# Altium PCB PW-Sat2_EPS_EM_Rbl.PcbDoc
Units mm, origin at the board's own origin, x right, y up, seen from the top; angles counter-clockwise.
Board outline 36.83 x 41.66 mm, 2 copper layers (Top Layer, Bottom Layer), stack 1.571 mm thick; 33 components, 17 nets, 110 pads, 4 vias.
Unrouted connection lines stored in the file: 2.
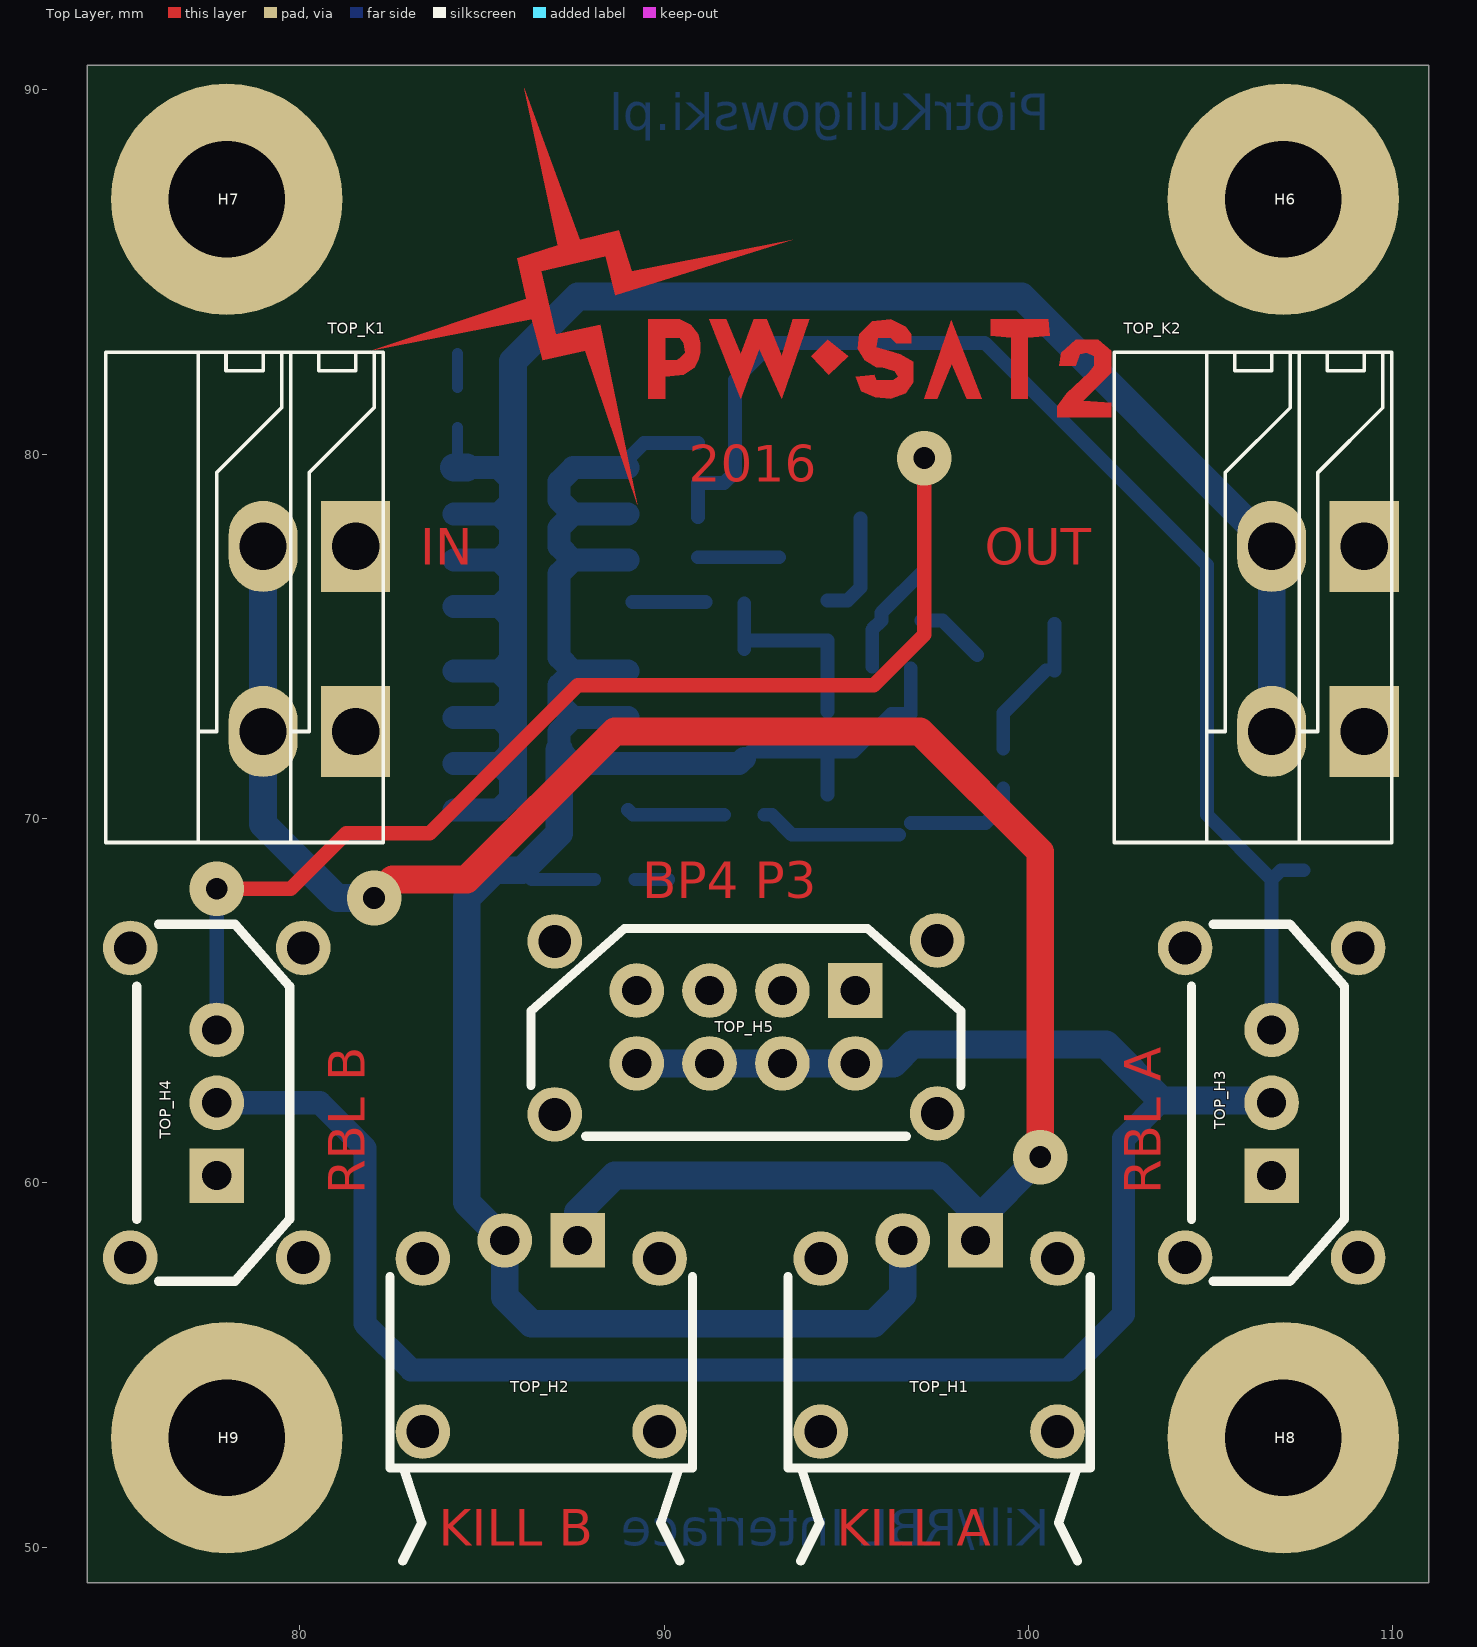
[diagram p0: Top Layer view]
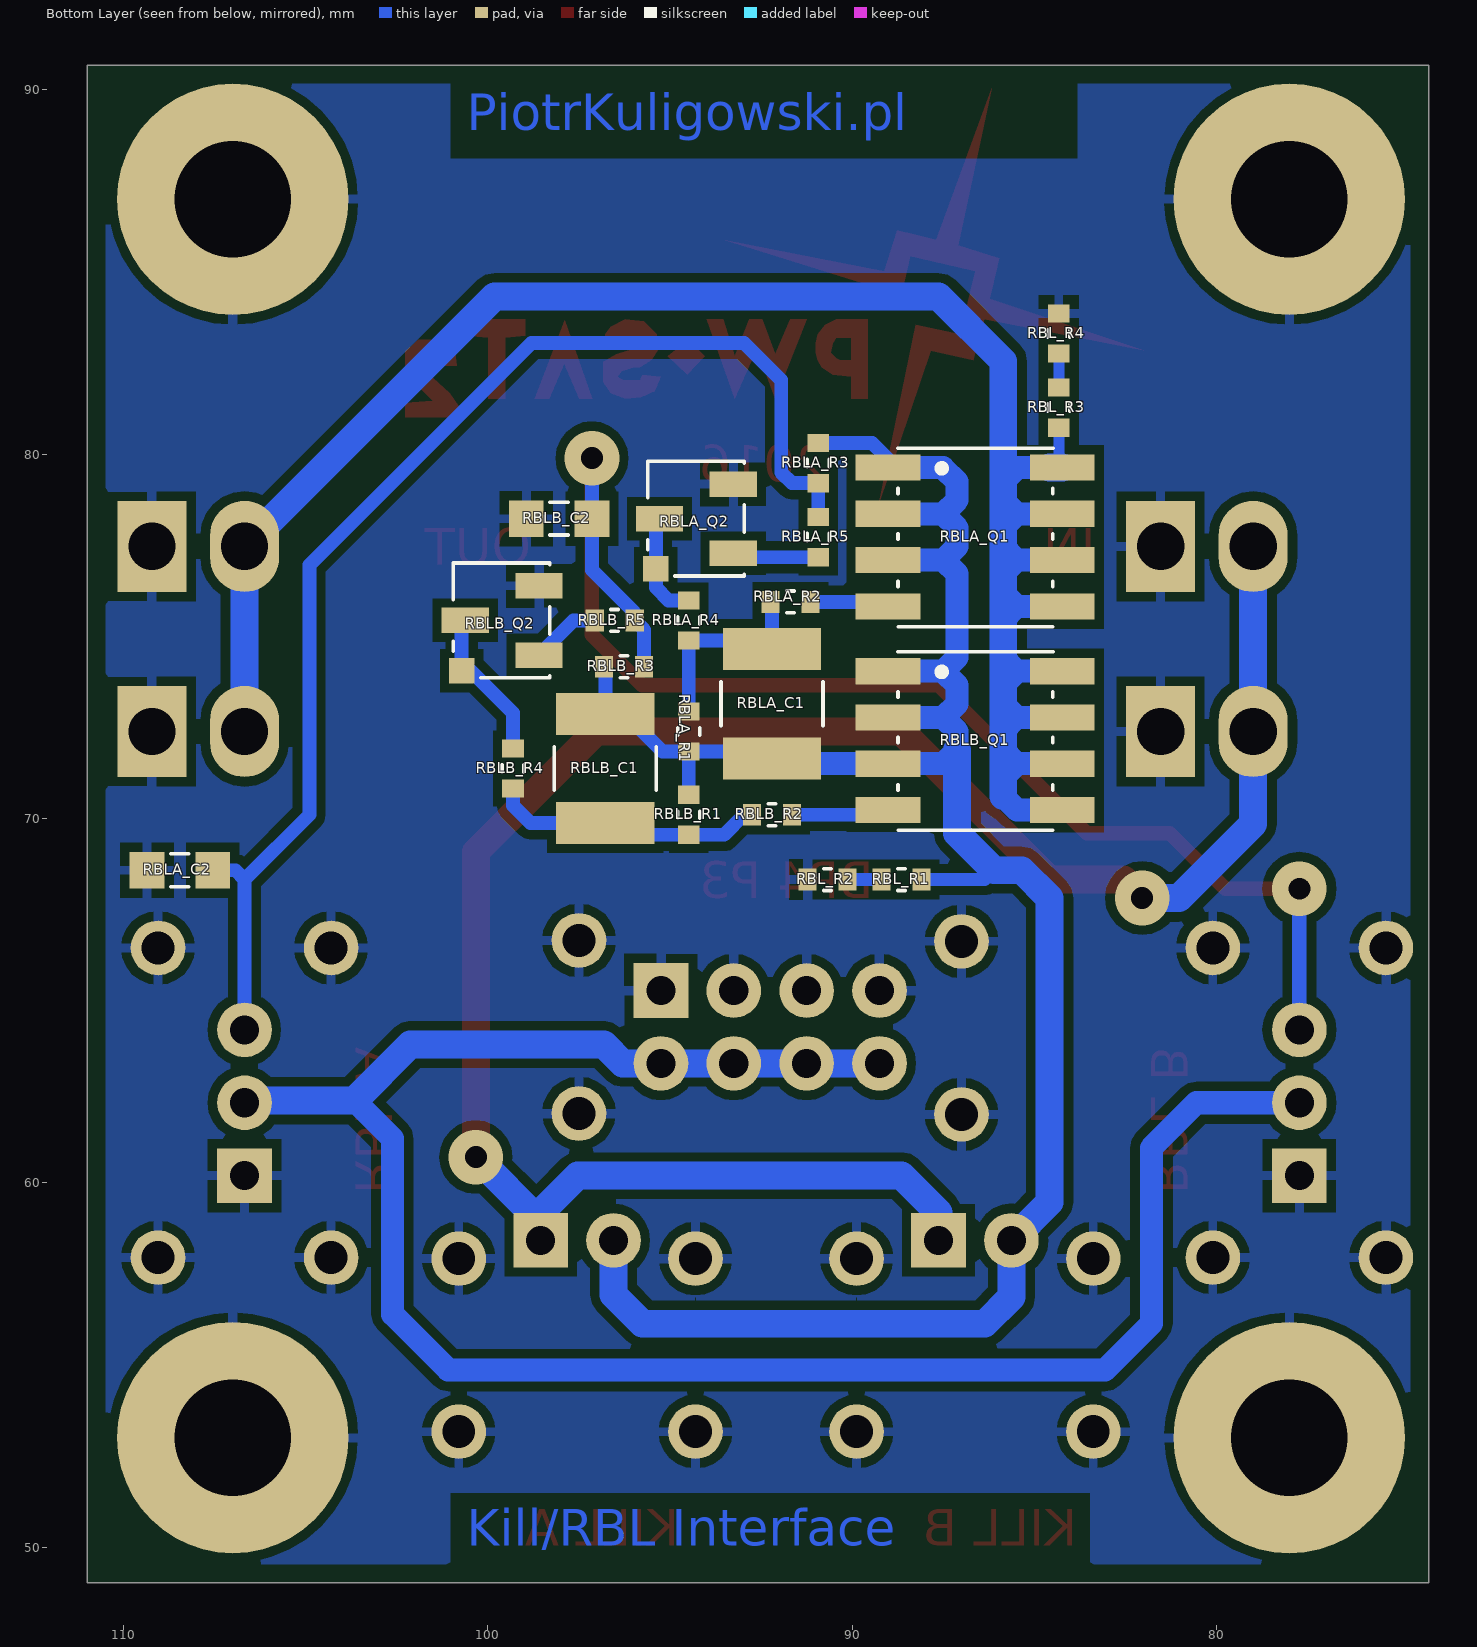
[diagram p1: Bottom Layer view, seen from below]
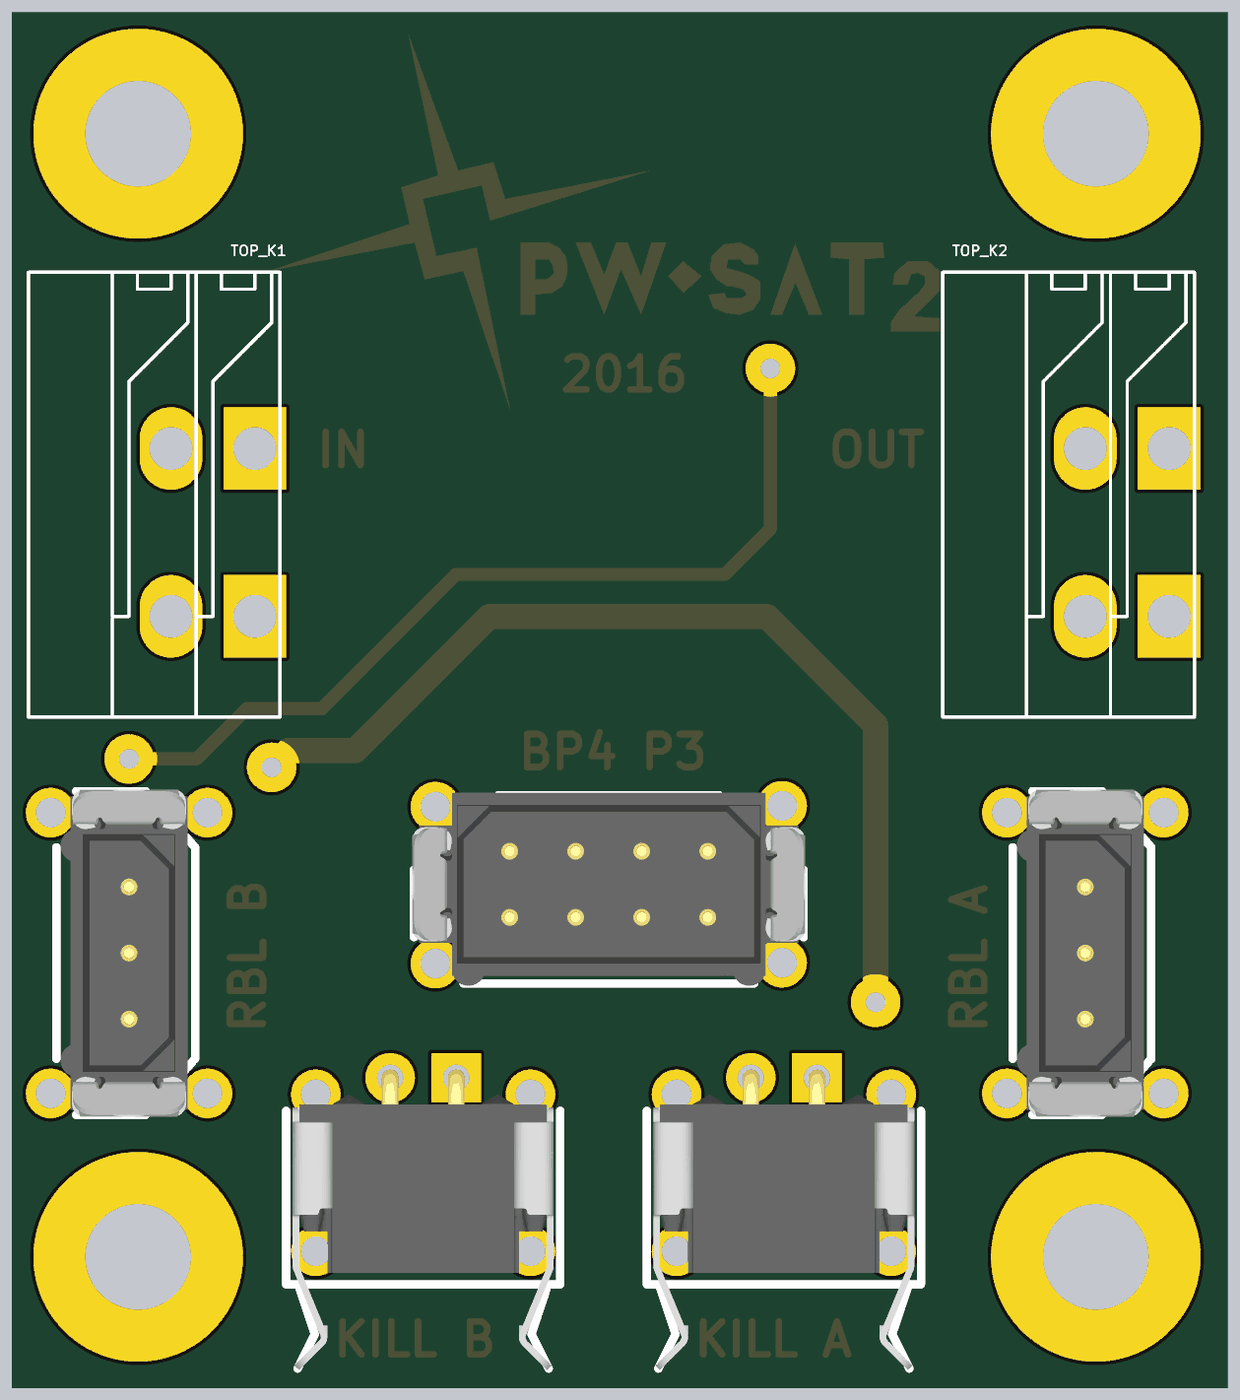
[diagram p2: 3D render of the assembled board from above, using the file's embedded part models]
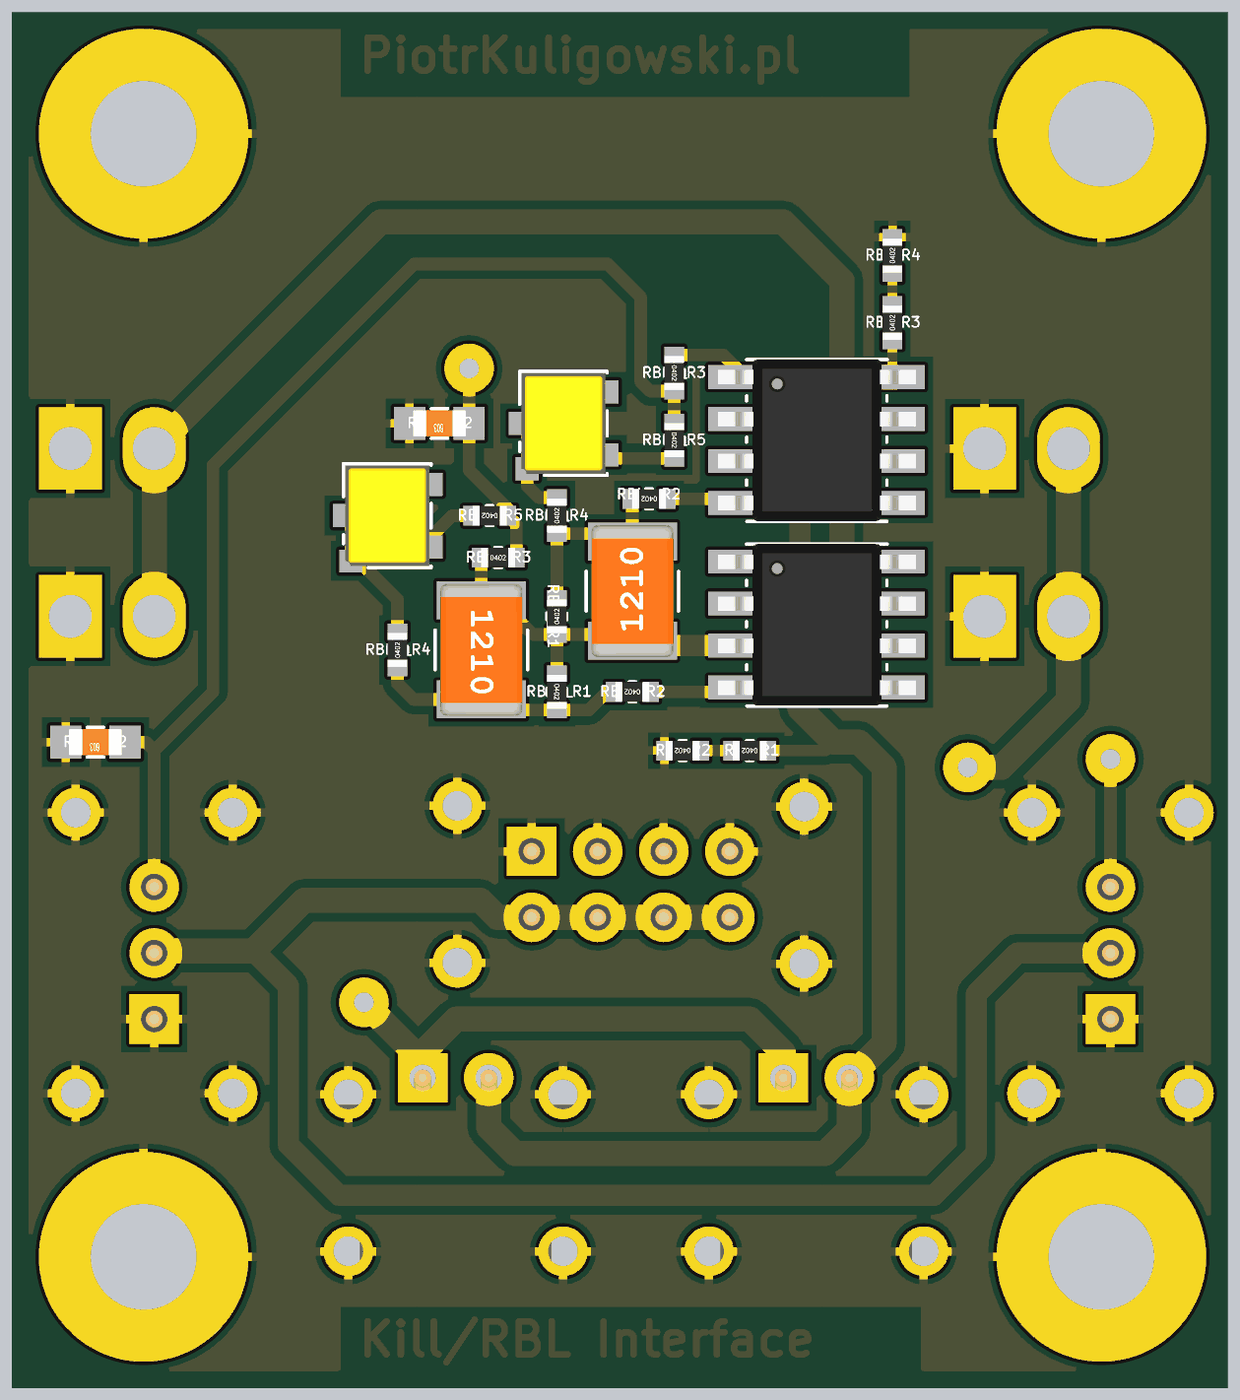
[diagram p3: 3D render of the assembled board from below, using the file's embedded part models]

## Layer stack, top to bottom
Top Layer: signal copper 0.0356
Dielectric 1: core 1.5, FR-4, Dk 4.2
Bottom Layer: signal copper 0.0356

## Board outline
74.168,49.022 74.168,90.678 110.998,90.678 110.998,49.022

## Design rules (kind name [scope] priority, off if disabled: settings)
Clearance [All] p1: gap=0.254
ComponentClearance [All] p1: gap=0.254 collisioncheckmode=3 verticalgap=0 showdistances=FALSE
PolygonConnect [All] p1: connectstyle=Relief reliefconductorwidth=0.254 reliefentries=4 polygonreliefangle="90 Angle" airgapwidth=0.254
RoutingVias [All] p1: holewidth=0.711 width=1.27 viastyle="Through Hole" minholewidth=0.711 minwidth=1.27 maxholewidth=0.711 maxwidth=1.27
SolderMaskExpansion [All] p1: expansion=0.102
Width [All] p1: maxlimit=1.27 minlimit=0.254 preferedwidth=0.254
29 further rules are at their usual default settings.

## Classes and differential pairs
component class "RBL & Inrush Limit": RBL_R1 RBL_R2 RBL_R3 RBL_R4 RBLA_C1 RBLA_C2 RBLA_Q1 RBLA_Q2 RBLA_R1 RBLA_R2 RBLA_R3 RBLA_R4 RBLA_R5 RBLB_C1 RBLB_C2 RBLB_Q1 RBLB_Q2 RBLB_R1 RBLB_R2 RBLB_R3 RBLB_R4 RBLB_R5
component class top_power: H6 H7 H8 H9 TOP_H1 TOP_H2 TOP_H3 TOP_H4 TOP_H5 TOP_K1 TOP_K2

## Components (designator, comment, footprint, x,y, rotation, side; value= is the part's Value field where it differs from the comment)
H6 "Mounting Hole" PC-104_PcbMntHole_M3 107,87 r0 top
H7 "Mounting Hole" PC-104_PcbMntHole_M3 78,87 r0 top
H8 "Mounting Hole" PC-104_PcbMntHole_M3 107,53 r0 top
H9 "Mounting Hole" PC-104_PcbMntHole_M3 78,53 r0 top
RBL_R1 "470k/1%" SMD_Resistor_0402 88.646,68.326 r0 bottom
RBL_R2 "470k/1%" SMD_Resistor_0402 90.678,68.326 r0 bottom
RBL_R3 "470k/1%" SMD_Resistor_0402 84.328,81.28 r90 bottom
RBL_R4 "470k/1%" SMD_Resistor_0402 84.328,83.312 r90 bottom
RBLA_C1 "10u/35V" SMD_Capacitor_1210 92.202,73.152 r90 bottom
RBLA_C2 "100n/50V" SMD_Capacitor_0603 108.458,68.58 r0 bottom
RBLA_Q1 "IRF7416" SOIC-8-N_SSSGDDDD 86.614,77.724 r180 bottom
RBLA_Q2 "2N2222ACSM" LCC1-4_BEC 92.964,78.232 r90 bottom
RBLA_R1 "10k/1%" SMD_Resistor_0402 94.488,72.39 r90 bottom
RBLA_R2 "220R/1%" SMD_Resistor_0402 91.694,75.946 r0 bottom
RBLA_R3 "22k/1%" SMD_Resistor_0402 90.932,79.756 r270 bottom
RBLA_R4 "4.7k/1%" SMD_Resistor_0402 94.488,75.438 r90 bottom
RBLA_R5 "10k/1%" SMD_Resistor_0402 90.932,77.724 r270 bottom
RBLB_C1 "10u/35V" SMD_Capacitor_1210 96.774,71.374 r270 bottom
RBLB_C2 "100n/50V" SMD_Capacitor_0603 98.044,78.232 r0 bottom
RBLB_Q1 "IRF7416" SOIC-8-N_SSSGDDDD 86.614,72.136 r180 bottom
RBLB_Q2 "2N2222ACSM" LCC1-4_BEC 98.298,75.438 r90 bottom
RBLB_R1 "22k/1%" SMD_Resistor_0402 94.488,70.104 r270 bottom
RBLB_R2 "220R/1%" SMD_Resistor_0402 92.202,70.104 r0 bottom
RBLB_R3 "22k/1%" SMD_Resistor_0402 96.266,74.168 r180 bottom
RBLB_R4 "10k/1%" SMD_Resistor_0402 99.314,71.374 r90 bottom
RBLB_R5 "10k/1%" SMD_Resistor_0402 96.52,75.438 r0 bottom
TOP_H1 "KillSwitch-A" Harwin_Datamate_L-Tek_M80-8760205 98.552,58.42 r180 top
TOP_H2 "KillSwitch-B" Harwin_Datamate_L-Tek_M80-8760205 87.63,58.42 r180 top
TOP_H3 "RblSwitch-A" Harwin_Datamate_L-Tek_M80-8770305 106.68,60.198 r90 top
TOP_H4 "RblSwitch-B" Harwin_Datamate_L-Tek_M80-8770305 77.724,60.198 r90 top
TOP_H5 "BP4_P3" Harwin_Datamate_L-Tek_M80-8670805 95.25,65.278 r180 top
TOP_K1 "TB-2.5-PD-xx" TerminalBlock_Spring_2.54_2-R 81.534,72.39 r90 top
TOP_K2 "TB-2.5-PD-xx" TerminalBlock_Spring_2.54_2-R 109.22,72.39 r90 top

## Footprints (in the part's own frame and the unit in brackets; to place one, negate y for a bottom-side part, rotate by r counter-clockwise, add the part's x,y. Pads: shape width x height; smd on the part's side, far side on the other; paste and mask are expansions set on the pad)
Harwin_Datamate_L-Tek_M80-8670805 [mm] "Harwin Datamate L-Teck M80-8670805, 2mm pitch, 2x4pin."
  round 1.5 hole 0.9: 0(-2.25,3.375) 0(-2.25,-1.375) 0(8.25,-1.35) 0(8.25,3.4)
  rect 1.5x1.5 hole 0.8: 1(0,0)
  round 1.5 hole 0.8: 2(0,2) 3(2,0) 4(2,2) 5(4,0) 6(4,2) 7(6,0) 8(6,2)
  silkscreen extent -2.9,-1.7 8.9,4, body extent -2.95,-1.77 8.95,4.08, height 8.35
Harwin_Datamate_L-Tek_M80-8760205 [mm] "Harwin Datamate L-Teck M80-8760205, 2mm pitch, 1x2pin, right angle."
  round 1.5 hole 0.9: 0(-2.25,5.25) 0(-2.25,0.5) 0(4.25,5.25) 0(4.25,0.5)
  rect 1.5x1.5 hole 0.8: 1(0,0)
  round 1.5 hole 0.8: 2(2,0)
  silkscreen extent -3.15,1 5.15,8.8, body extent -2.95,-0.25 4.95,8.85, height 3.88
Harwin_Datamate_L-Tek_M80-8770305 [mm] "Harwin Datamate L-Teck M80-8770305, 2mm pitch, 1x3pin."
  round 1.5 hole 0.9: 0(-2.25,-2.375) 0(-2.25,2.375) 0(6.25,-2.375) 0(6.25,2.375)
  rect 1.5x1.5 hole 0.8: 1(0,0)
  round 1.5 hole 0.8: 2(2,0) 3(4,0)
  silkscreen extent -2.9,-2 6.9,2.2, body extent -2.95,-1.77 6.95,2.08, height 8.21
LCC1-4_BEC [mm] "Hermetic Leadless Chip Carrier Number 1, 4 Pads, Base-Emitter-Collector"
  rect 0.7x1.3 smd: B(-0.95,0.3) C(0,2.325) E(0.95,0.3)
  rect 0.7x0.7 smd: Shield(-1.375,2.425)
  silkscreen extent -1.58,0 1.58,2.65, body extent -1.53,0.05 1.52,2.6, height 1.4
PC-104_PcbMntHole_M3 [mm] "PCB Mounting Hole for PC-104 standard. Based on Pumpkin's Kit."
  round 6.35 hole 3.2: 1(0,0)
SMD_Capacitor_0603 [mm] "SMD Capacitor, Inch 0603, Metric 1608."
  rect 0.95x1 smd: 1(-0.9,0) 2(0.9,0)
  silkscreen extent -0.25,-0.45 0.25,0.45, body extent -0.8,-0.4 0.8,0.4, height 0.3
SMD_Capacitor_1210 [mm] "SMD Capacitor, Inch 1210, Metric 3225."
  rect 1.15x2.7 smd: 1(-1.5,0) 2(1.5,0)
  silkscreen extent -0.6,-1.4 0.6,1.4, body extent -2,-1.24 2,1.24, height 1.7
SMD_Resistor_0402 [mm] "SMD Resistor, Inch 0402, Metric 1005."
  rect 0.5x0.6 smd: 1(-0.55,0) 2(0.55,0)
  silkscreen extent -0.1,-0.3 0.1,0.3, body extent -0.52,-0.3 0.52,0.3, height 0.34
SOIC-8-N_SSSGDDDD [mm] "JEDEC standard. SO-8. SSSGDDDD."
  rect 1.78x0.72 smd: D(2.38,-1.9) D(2.38,-0.63) D(2.38,0.64) D(2.38,1.91) G(-2.4,-1.9) S(-2.4,-0.63) S(-2.4,0.64) S(-2.4,1.91)
  silkscreen extent -2.13,-2.46 2.13,2.44, body extent -3,-2.45 3,2.45, height 1.7
TerminalBlock_Spring_2.54_2-R [mm] "Terminal block with spring, 2.54mm pitch, right angle, 2-pin."
  rect 2.5x1.9 hole 1.3: 1(0,0) 1(5.08,0)
  oval 2.5x1.9 hole 1.3: 2(0,2.54) 2(5.08,2.54)
  silkscreen extent -3.05,-0.76 10.41,6.86, body extent -3.05,-0.74 10.41,6.86, height 12.6

## Part data
H6 H7 H8 H9: library part MntHole, "PCB Mounting Hole"
RBL_R1 RBL_R2 RBL_R3 RBL_R4: library part CRCW0402470KFKxxxx, "470k/1% Vishay CRCW 0402 Resistor. 63mW, 100ppm, 50V."
RBLA_C1 RBLB_C1: library part Cer_GCM32EC7YA106KA03K, "Ceramic Cap Murata Automotive 10u/35V X7S 1210"
RBLA_C2 RBLB_C2: library part Cer_GCJ188R71H104KA12D, "Ceramic Cap Murata Automotive 100n/50V X7R 0603"
RBLA_Q1 RBLB_Q1: "10A/30V HEXFET Power P-MOSFET."
RBLA_Q2 RBLB_Q2: "Silicon Planar Epitaxial NPN Transistor."
RBLA_R1 RBLA_R5 RBLB_R4 RBLB_R5: library part CRCW040210K0FKxxxx, "10k/1% Vishay CRCW 0402 Resistor. 63mW, 100ppm, 50V."
RBLA_R2 RBLB_R2: library part CRCW0402220RFKxxxx, "220R/1% Vishay CRCW 0402 Resistor. 63mW, 100ppm, 50V."
RBLA_R3 RBLB_R1 RBLB_R3: library part CRCW040222K0FKxxxx, "22k/1% Vishay CRCW 0402 Resistor. 63mW, 100ppm, 50V."
RBLA_R4: library part CRCW04024K70FKxxxx, "4.7k/1% Vishay CRCW 0402 Resistor. 63mW, 100ppm, 50V."
TOP_H1 TOP_H2: library part Harwin_Datamate_L-Tek_1x2pin, "Harwin DataMate L-Tek, 2mm pitch, 1x2pin."
TOP_H3 TOP_H4: library part Harwin_Datamate_L-Tek_1x3pin, "Harwin DataMate L-Tek, 2mm pitch, 1x3pin."
TOP_H5: library part Harwin_Datamate_L-Tek_2x4pin, "Harwin DataMate L-Tek, 2mm pitch, 2x4pin."
TOP_K1 TOP_K2: library part TerminalBlock_Spring_2.54_2-R, "Terminal block with spring, 2-pin, 2.54mm pitch, right angle."

## Via types
v1: diameter 1.5, hole 0.6, Top Layer to Bottom Layer, 4 vias

## Nets (pads, with @x,y where several pads share a name; then routed paths per layer and width w, separated by ;. In a path a pad name is that pad's centre, name@x,y a point inside that pad or via, vN(x,y) a via of type N, cw(c..) or ccw(c..) an arc to the next point about the centre after c; other vN are vias at no path point)
NetRBL_R1_1: RBL_R1.1 RBLA_C1.1 RBLA_Q1.S RBLA_R1.1 RBLA_R3.1 RBLB_C1.1 RBLB_Q1.S RBLB_R1.1 RBLB_R3.1 TOP_H1.2 TOP_H2.2 | length 63.7
  Bottom Layer w0.35: 86.106,68.58 86.36,68.326 RBL_R1.1
  Bottom Layer w0.381: RBLA_Q1.S@89.014,79.634 89.014,79.87 89.45,80.306 RBLA_R3.1 ; RBLA_C1.1@92.39,71.84 RBLA_R1.1 ; RBLB_R1.1 RBLA_R1.1 ; RBLB_R3.1@96.774,74.126 RBLB_C1.1 96.242,72.874 95.208,71.84 RBLA_R1.1
  Bottom Layer w0.635: RBLB_Q1.S@89.014,72.776 87.498,72.776 ; RBLB_Q1.S@89.014,74.046 87.498,74.046 ; RBLA_Q1.S@89.014,77.094 87.498,77.094 ; RBLA_Q1.S@89.014,78.364 87.508,78.364 ; RBLA_Q1.S@89.014,79.634 87.508,79.634 87.122,79.248 87.122,78.74 87.498,78.364 87.508,78.364 ; RBLA_C1.1 92.056,71.506 89.014,71.506 87.498,71.506 87.122,71.882 87.122,72.39 87.498,72.766 87.498,72.776 ; 87.498,72.776 87.122,73.152 87.122,73.66 87.498,74.036 87.498,74.046 ; 87.498,74.046 87.122,74.422 87.122,76.718 87.498,77.094 ; 87.498,77.094 87.122,77.47 87.122,77.978 87.508,78.364
  Bottom Layer w0.762: 87.122,71.882 87.122,69.596 86.106,68.58 85.344,68.58 84.582,67.818 84.582,59.468 TOP_H2.2 85.63,56.864 86.36,56.134 95.758,56.134 96.552,56.928 TOP_H1.2
NetRBL_R1_2: RBL_R1.2 RBL_R2.1 | length 0.9
  Bottom Layer w0.35: RBL_R1.2 RBL_R2.1
NetRBL_R3_1: RBL_R3.1 RBLA_Q1.D RBLB_Q1.D TOP_K2.2 | length 63.9
  Bottom Layer w0.3: RBLA_Q1.D@84.328,79.728 RBL_R3.1
  Bottom Layer w0.635: RBLB_Q1.D@84.234,70.236 85.476,70.236 85.852,70.612 85.852,71.12 85.466,71.506 ; RBLB_Q1.D@84.234,71.506 85.466,71.506 ; RBLB_Q1.D@84.234,72.776 85.476,72.776 ; RBLB_Q1.D@84.234,74.046 85.476,74.046 ; RBLA_Q1.D@84.234,75.824 85.476,75.824 ; RBLA_Q1.D@84.234,77.094 85.476,77.094 ; RBLA_Q1.D@84.234,78.364 85.476,78.364 ; RBLA_Q1.D@84.582,79.634 85.466,79.634 85.852,79.248 85.852,78.74 85.476,78.364 ; 85.466,71.506 85.476,71.506 85.852,71.882 85.852,72.4 85.476,72.776 ; 85.476,72.776 85.852,73.152 85.852,73.66 85.476,74.036 85.476,74.046 ; 85.476,74.046 85.852,74.422 85.852,75.448 85.476,75.824 ; 85.476,75.824 85.852,76.2 85.852,76.718 85.476,77.094 ; 85.476,77.094 85.852,77.47 85.852,77.978 85.476,78.354 85.476,78.364
  Bottom Layer w0.762: RBLA_Q1.D@84.234,79.634 RBLA_Q1.D@84.582,79.634 ; 85.852,70.612 85.852,82.55 87.63,84.328 99.822,84.328 106.68,77.47 TOP_K2.2@106.68,72.39
NetRBL_R3_2: RBL_R3.2 RBL_R4.1 | length 0.9
  Bottom Layer w0.3: RBL_R3.2 RBL_R4.1
NetRBLA_C1_2: RBLA_C1.2 RBLA_R1.2 RBLA_R2.2 RBLA_R4.1 | length 5.3
  Bottom Layer w0.381: RBLA_C1.2 RBLA_R2.2@92.202,75.904 ; RBLA_C1.2@92.438,74.888 RBLA_R4.1 RBLA_R1.2
NetRBLA_Q1_G: RBLA_Q1.G RBLA_R2.1 | length 2
  Bottom Layer w0.381: RBLA_Q1.G@89.136,75.946 RBLA_R2.1
NetRBLA_Q2_B: RBLA_Q2.B RBLA_R5.2 | length 2.2
  Bottom Layer w0.381: RBLA_R5.2 RBLA_Q2.B@93.156,77.174
NetRBLA_Q2_C: RBLA_Q2.C RBLA_Q2.Shield RBLA_R4.2 | length 2.9
  Bottom Layer w0.381: RBLA_R4.2 95.038,75.988 95.389,76.339 RBLA_Q2.C@95.389,78.232
NetRBLB_C1_2: RBLB_C1.2 RBLB_R1.2 RBLB_R2.2 RBLB_R4.1 | length 7.1
  Bottom Layer w0.381: RBLB_R2.2 92.964,70.104 93.514,69.554 RBLB_R1.2 RBLB_C1.2@96.454,69.554 ; RBLB_C1.2 98.83,69.874 99.314,70.358 RBLB_R4.1
NetRBLB_Q1_G: RBLB_Q1.G RBLB_R2.1 | length 2.7
  Bottom Layer w0.381: RBLB_Q1.G 89.146,70.104 RBLB_R2.1
NetRBLB_Q2_B: RBLB_Q2.B RBLB_R5.2 | length 1.9
  Bottom Layer w0.381: RBLB_R5.2 97.648,75.438 RBLB_Q2.B
NetRBLB_Q2_C: RBLB_Q2.C RBLB_Q2.Shield RBLB_R4.2 | length 3.9
  Bottom Layer w0.381: RBLB_R4.2 99.314,72.898 RBLB_Q2.Shield@100.479,74.063 ; RBLB_Q2.Shield RBLB_Q2.C@100.723,75.338
NetTOP_H1_1: TOP_H1.1 TOP_H2.1 TOP_K1.2 | length 57.2
  Top Layer w0.762: v1(82.042,67.818) 82.55,68.326 84.582,68.326 88.646,72.39 97.028,72.39 100.33,69.088 v1(100.33,60.706)
  Bottom Layer w0.762: TOP_K1.2@78.994,77.47 78.994,72.39 78.994,69.85 81.026,67.818 v1(82.042,67.818) ; TOP_H2.1 87.63,59.182 88.646,60.198 97.536,60.198 98.552,59.182 TOP_H1.1@98.552,58.928 ; TOP_H1.1 TOP_H1.1@98.552,58.928 ; v1(100.33,60.706) TOP_H1.1@98.552,58.928
NetTOP_H3_2: TOP_H3.2 TOP_H4.2 TOP_H5.2 TOP_H5.4 TOP_H5.6 TOP_H5.8 | length 55.4
  Bottom Layer w0.635: TOP_H4.2@78.232,62.198 80.55,62.198 81.788,60.96 81.788,56.134 83.058,54.864 101.092,54.864 102.616,56.388 102.616,61.214 103.664,62.262
  Bottom Layer w0.762: TOP_H5.8 TOP_H5.6 TOP_H5.4 TOP_H5.2 96.298,63.278 96.816,63.796 102.13,63.796 103.664,62.262 TOP_H3.2@106.616,62.262
PGND: H6.1 H7.1 H8.1 H9.1 RBL_R2.2 RBL_R4.2 RBLA_C2.2 RBLA_Q2.E RBLB_C2.2 RBLB_Q2.E TOP_H1.0 TOP_H2.0 TOP_H3.0 TOP_H3.1 TOP_H4.0 TOP_H4.1 TOP_H5.0 TOP_H5.1 TOP_H5.3 TOP_H5.5 TOP_H5.7 TOP_K1.1 TOP_K2.1
RBLA: RBLA_C2.1 RBLA_R3.2 RBLA_R5.1 TOP_H3.3 | length 35
  Bottom Layer w0.381: RBLA_R5.1 RBLA_R3.2 91.652,79.206 91.948,79.502 91.948,82.042 92.964,83.058 98.806,83.058 104.902,76.962 104.902,70.104 106.68,68.326 ; TOP_H3.3 106.68,68.326 ; RBLA_C2.1 106.934,68.58 106.68,68.326
RBLB: RBLB_C2.1 RBLB_R3.2 RBLB_R5.1 TOP_H4.3 | length 37.3
  Top Layer w0.4: v1(77.724,68.072) 79.756,68.072 81.28,69.596 83.566,69.596 87.63,73.66 95.758,73.66 97.144,75.046 v1(97.144,79.894)
  Bottom Layer w0.381: RBLB_R3.2 95.716,75.184 RBLB_R5.1 95.97,75.65 97.144,76.824 RBLB_C2.1 v1(97.144,79.894)
  Bottom Layer w0.4: TOP_H4.3 v1(77.724,68.072)

## Polygon pours and split planes (outlines as drawn)
PGND on Bottom Layer "PGND Polygon" (solid, remove dead copper, pour order 0): 74.676,90.17 74.676,49.53 110.49,49.53 110.49,90.17

## Other copper
Top Layer:
  region: 85.965,85.38 87.083,85.736 86.168,90.054 87.692,85.888 88.759,86.142 89.115,85.025 93.534,85.888 88.658,84.364 88.404,85.431 86.626,85.025 87.032,83.297 88.251,83.551 89.267,78.624 87.845,82.84 86.676,82.586 86.372,83.704 81.952,82.84 86.219,84.263
  region: 101.662,82.231 101.053,81.672 100.799,81.316 100.799,81.011 102.272,81.011 102.272,81.418 101.51,81.469 102.272,82.231 102.272,82.84 101.916,83.145 101.307,83.145 100.9,82.789 100.85,82.434 101.307,82.434 101.408,82.739 101.612,82.789 101.815,82.688 101.815,82.434
  region: 99.529,81.519 99.986,81.519 99.986,83.196 100.596,83.247 100.545,83.704 98.97,83.704 98.97,83.247 99.529,83.196
  region: 97.141,81.519 97.891,83.678 98.716,81.519 98.31,81.519 97.903,82.485 97.497,81.519
  region: 95.973,82.383 95.82,82.383 95.516,82.586 95.312,82.891 95.363,83.297 95.719,83.653 96.227,83.704 96.633,83.501 96.786,83.297 96.786,83.043 96.379,83.043 96.227,83.196 95.871,83.196 95.82,82.942 96.176,82.84 96.481,82.739 96.836,82.535 96.836,81.977 96.633,81.672 96.227,81.519 95.795,81.57 95.414,81.723 95.262,82.129 95.77,82.18 95.82,82.027 96.278,82.027 96.43,82.129 96.328,82.281
  region: 95.058,82.688 94.5,83.145 94.042,82.688 94.525,82.18
  region: 91.248,83.704 92.112,81.519 92.62,82.891 93.23,81.519 93.992,83.704 93.534,83.704 93.23,82.688 92.823,83.704 92.468,83.704 92.112,82.739 91.706,83.704
  region: 89.572,81.519 89.572,83.704 90.436,83.704 90.74,83.551 90.944,83.297 90.994,83.043 90.994,82.789 90.944,82.586 90.842,82.383 90.537,82.18 90.029,82.129 90.029,82.586 90.334,82.586 90.436,82.637 90.588,82.789 90.537,83.043 90.436,83.196 90.029,83.196 90.029,81.519
  text "2016" at 90.678,79.248 h1
  text "IN" at 83.312,76.962 h1
  text "OUT" at 98.806,76.962 h1
  text "BP4 P3" at 89.408,67.818 h1
  text "RBL B" at 81.788,59.69 h1 r90
  text "RBL A" at 103.632,59.69 h1 r90
  text "KILL B" at 83.82,50.038 h1
  text "KILL A" at 94.742,50.038 h1
Bottom Layer:
  text "PiotrKuligowski.pl" at 100.584,88.9 h1
  text "Kill/RBL Interface" at 100.584,50.038 h1

## Silkscreen, mask and mechanical layers (free items; w line width, h text height)
Mechanical 1:
  the board outline again, w0.254